# Altium PCB PCB1.PcbDoc
Units mil, origin at the board's own origin, x right, y up, seen from the top; angles counter-clockwise.
Board outline 6000 x 4000 mil, 2 copper layers (Top Layer, Bottom Layer), stack 61.756 mil thick; 26 components, 23 nets, 100 pads, 0 vias.
Unrouted connection lines stored in the file: 55.
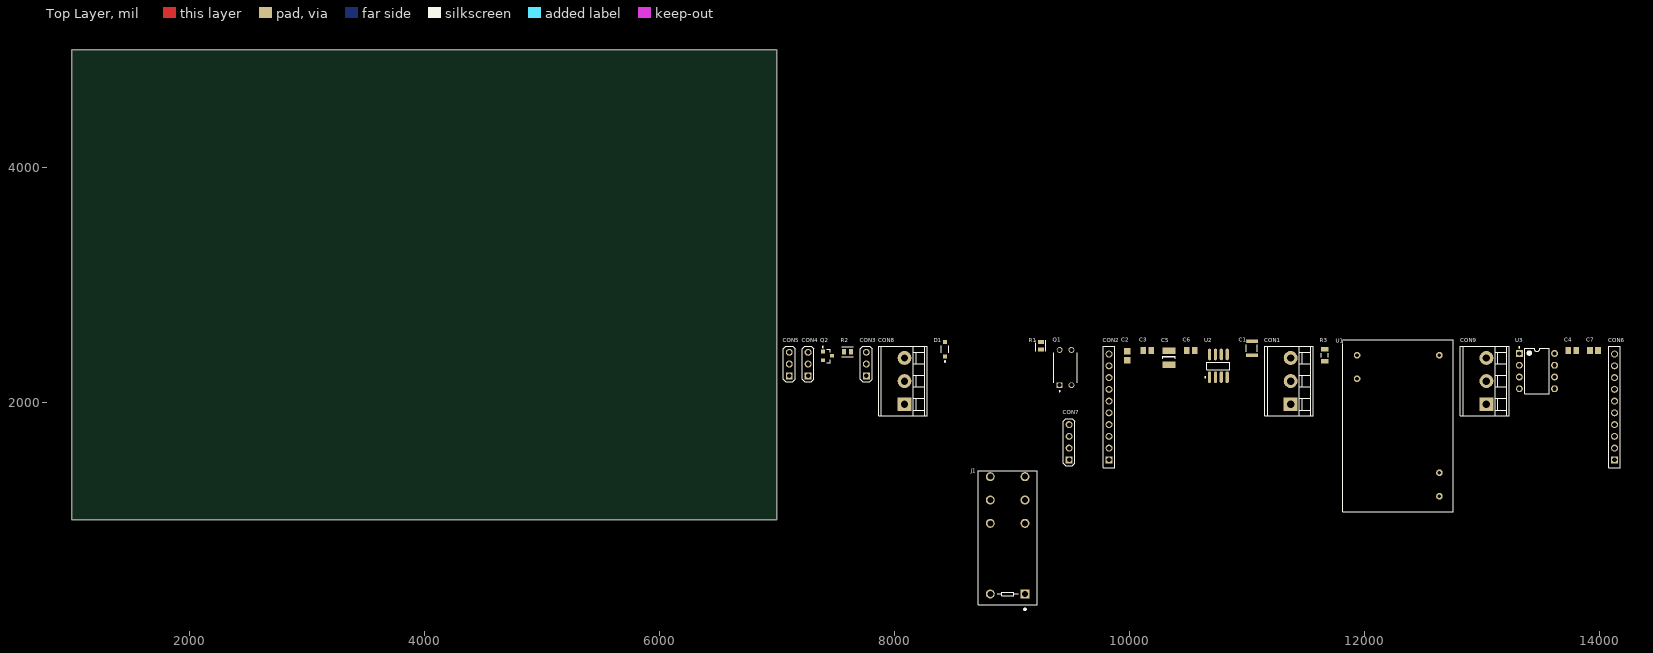
[diagram p0: Top Layer view]
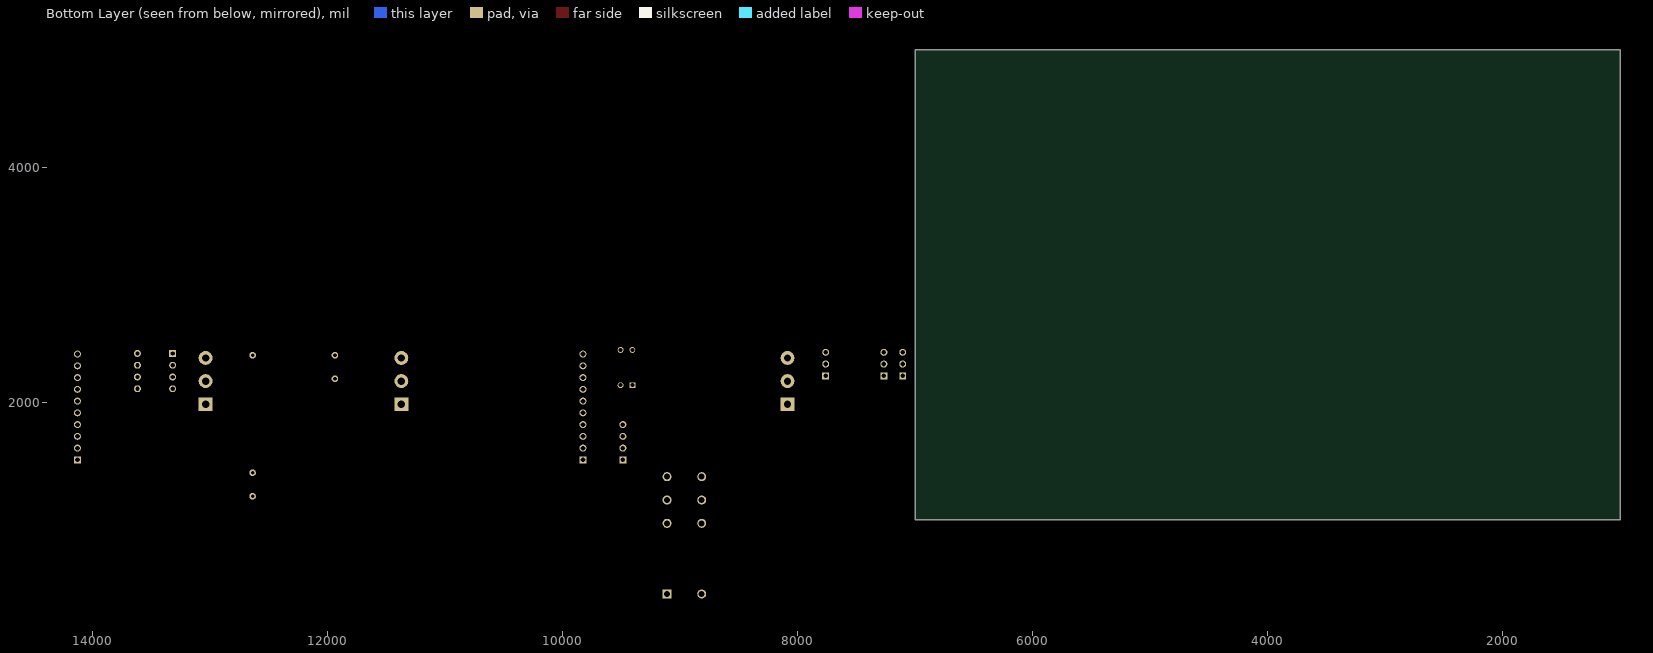
[diagram p1: Bottom Layer view, seen from below]

## Layer stack, top to bottom
Top Solder: solder mask 1, SM-001, Dk 4
Top Layer: signal copper 1.378
Dielectric 1: core 59, Core-043, Dk 4.3
Bottom Layer: signal copper 1.378
Bottom Solder: solder mask 1, SM-001, Dk 4

## Board outline
1000,1000 7000,1000 7000,5000 1000,5000

## Design rules (kind name [scope] priority, off if disabled: settings)
Clearance [All] p1: gap=10 ignorepadtopadclearanceinfootprint=FALSE except(0: Arc-Hole Track-Hole SMDPad-Hole THPad-Hole Via-Hole Fill-Hole Poly-Hole Region-Hole Text-Hole)
PolygonConnect [All] p1: connectstyle=Relief reliefconductorwidth=10 reliefentries=4 polygonreliefangle="90 Angle" airgapwidth=10
RoutingVias [All] p1: holewidth=28 width=50 viastyle="Through Hole" minholewidth=28 minwidth=50 maxholewidth=28 maxwidth=50
SolderMaskExpansion [All] p1: expansion=4 istentingtop=FALSE
Width [All] p1: maxlimit=10 minlimit=10 preferedwidth=10
30 further rules are at their usual default settings.

## Components (designator, comment, footprint, x,y, rotation, side; value= is the part's Value field where it differs from the comment)
C1 "47uF" MURA-1210_H_2.7_L 11040,2460 r90 top
C2 "10uF" CAPC2013X135X45ML10T25 9980,2395 r90 top
C3 "0.1uF" CAPC2013X140X45NL15T25 10150,2440 r0 top
C4 "0.1uF" CAPC2013X140X45NL15T25 13765,2440 r0 top
C5 "1uF" TANTAL_B 10335,2380 r90 top
C6 "0.1uF" CAPC2013X140X45NL15T25 10520,2440 r0 top
C7 "0.1uF" CAPC2013X140X45NL15T25 13950,2440 r0 top
CON1 "DG128-3" DG129-3 11370,2180 r90 top
CON2 "PBS-10" PBS-10 9825,1960 r90 top
CON3 "PLS-03" PLS-03 7760,2325 r90 top
CON4 "PLS-03" PLS-03 7265,2325 r90 top
CON5 "PLS-03" PLS-03 7105,2325 r90 top
CON6 "PBS-10" PBS-10 14125,1960 r90 top
CON7 "PLS-04" PLS-04 9485,1660 r90 top
CON8 "DG128-3" DG129-3 8085,2180 r90 top
CON9 "DG128-3" DG129-3 13035,2180 r90 top
D1 "1N4148W-13-F" FP-SOD123-MFG 8430,2450 r90 top value=2pF
J1 "9-1393239-1" RELAY_9-1393239-1 9110,369.21 r90 top
Q1 "PC817C" DIP762W50P254L650H458Q4B 9455,2295 r90 top
Q2 "MMBT2222ALT3G" ONSC-SOT-23-3-318-08_V 7430,2395 r0 top
R1 "150" FP-CR0805-IPC_C 9245,2480 r90 top
R2 "300" FP-CR0805-IPC_C 7600,2430 r0 top
R3 "10k" FP-CRCW1206-e3-IPC_C 11660,2400 r90 top
U1 "IRM-03-5" footprint_IRM-03-5 12635,1200 r90 top
U2 "REF198GSZ" ADI-R-8_M 10755,2310 r90 top
U3 "MCP3202-BI/P" PDIP300-P8 13465,2265 r0 top

## Footprints (in the part's own frame and the unit in brackets; to place one, negate y for a bottom-side part, rotate by r counter-clockwise, add the part's x,y. Pads: shape width x height; smd on the part's side, far side on the other; paste and mask are expansions set on the pad)
ADI-R-8_M [mm] "SOIC, 8-Leads, Body 4.9x3.9mm, Pitch 1.27mm, IPC Low Density"
  oval 2.5x0.7 smd: 1(-2.45,1.905) 2(-2.45,0.635) 3(-2.45,-0.635) 4(-2.45,-1.905) 5(2.45,-1.905) 6(2.45,-0.635) 7(2.45,0.635) 8(2.45,1.905)
  silkscreen extent -2.57,-2.5 0.8,2.93, body extent -2,-2.5 2,2.5, height 1.75
CAPC2013X135X45ML10T25 [mm] "Chip Capacitor, 2-Leads, Body 2.10x1.35mm, IPC Low Density"
  rect 1.4x1.5 smd: 1(-0.95,0) 2(0.95,0)
  body extent -1.05,-0.67 1.05,0.67, height 1.35
CAPC2013X140X45NL15T25 [mm] "Chip Capacitor, 2-Leads, Body 2.00x1.25mm, IPC Medium Density"
  rect 1.25x1.45 smd: 1(-0.85,0) 2(0.85,0)
  body extent -1.08,-0.7 1.07,0.7, height 1.4
DG129-3 [mm]
  rect 3x3 hole 1.6 paste-0.05 mask+0.05: 1(-5,0)
  round 3 hole 1.6 paste-0.05 mask+0.05: 2(0,0) 3(5,0)
  silkscreen extent -7.5,-4.9 7.5,5.6
DIP762W50P254L650H458Q4B [mm]
  rect 1.26x1.26 hole 0.85: 1(-3.81,1.27)
  round 1.26 hole 0.85: 2(-3.81,-1.27) 3(3.81,-1.27) 4(3.81,1.27)
  silkscreen extent -5.18,-2.54 3.25,2.54, body extent -3.94,-2.29 3.94,2.29, height 4.8
footprint_IRM-03-5 [mil]
  round 56 hole 31.5: +V(1000,700) -V(1200,700) AC/L(0,0) AC/N(200,0) NC(1200,0)
  silkscreen extent -130,-120 1330,820, body extent -130,-125 1327,820, height 591
FP-CR0805-IPC_C [mil]
  rect 33.79x49.69 smd paste+0 mask+0: 1(-30.59,0) 2(30.59,0)
  silkscreen extent -47,-42 47,42, body extent -51,-31 51,31, height 10
FP-CRCW1206-e3-IPC_C [mil]
  rect 37.64x65.28 smd paste+0 mask+0: 1(-52.21,0) 2(52.21,0)
  silkscreen extent -19,-31 19,31, body extent -75,-38 75,38, height 10
FP-SOD123-MFG [mm]
  rect 0.9x0.95 smd paste+0 mask+0: 1(-1.575,0) 2(1.575,0)
  silkscreen extent -2.75,-0.85 0.75,0.85, body extent -2.12,-0.95 2.12,0.95, height 0.25
MURA-1210_H_2.7_L [mm] "Chip Capacitor, 2-Leads, Body 3.5x2.7mm, IPC High Density"
  rect 0.75x2.6 smd: 1(-1.525,0) 2(1.525,0)
  silkscreen extent -0.75,-1.2 0.75,1.2, body extent -1.75,-1.35 1.75,1.35, height 2.7
ONSC-SOT-23-3-318-08_V [mm] "SOT23, 3-Leads, Body 2.92x1.3mm, Pitch 0.95mm"
  rect 0.9x0.8 smd: 1(-1,0.95) 2(-1,-0.95) 3(1,0)
  silkscreen extent -1.12,-1.46 0.65,2.02, body extent -0.65,-1.46 0.65,1.46, height 1.11
PBS-10 [mm]
  rect 1.5x1.5 hole 1 paste-0.05 mask+0.05: 1(-11.43,0)
  round 1.5 hole 1 paste-0.05 mask+0.05: 2(-8.89,0) 3(-6.35,0) 4(-3.81,0) 5(-1.27,0) 6(1.27,0) 7(3.81,0) 8(6.35,0) 9(8.89,0) 10(11.43,0)
  silkscreen extent -13.1,-1.27 13.1,1.27, body extent -13.1,-1.27 13.1,1.27, height 8.5
PDIP300-P8 [mm] "8-Pin Plastic Dual In-Line Package (PDIP)"
  rect 1.5x1.5 hole 0.9: 1(-3.81,3.81)
  round 1.5 hole 0.9: 2(-3.81,1.27) 3(-3.81,-1.27) 4(-3.81,-3.81) 5(3.81,-3.81) 6(3.81,-1.27) 7(3.81,1.27) 8(3.81,3.81)
  silkscreen extent -3.93,-4.9 2.65,5.23, body extent -3.55,-4.9 3.55,4.9, height 4.32
PLS-03 [mm]
  rect 1.5x1.5 hole 1 paste-0.05 mask+0.05: 1(-2.54,0)
  round 1.5 hole 1 paste-0.05 mask+0.05: 2(0,0) 3(2.54,0)
  silkscreen extent -3.81,-1.27 3.81,1.27, body extent -3.81,-1.27 3.81,1.27, height 8.6
PLS-04 [mm]
  rect 1.5x1.5 hole 1 paste-0.05 mask+0.05: 1(-3.81,0)
  round 1.5 hole 1 paste-0.05 mask+0.05: 2(-1.27,0) 3(1.27,0) 4(3.81,0)
  silkscreen extent -5.08,-1.27 5.08,1.27, body extent -5.08,-1.27 5.08,1.27, height 8.6
RELAY_9-1393239-1 [mm]
  round 1.95 hole 1.3: 11(20.3,0) 11-1(20.3,7.5) 12(15.26,0) 12-1(15.26,7.5) 14(25.34,0) 14-1(25.34,7.5) A2(0,7.5)
  rect 1.95x1.95 hole 1.3: A1(0,0)
  silkscreen extent -3.51,-2.6 26.65,10.1, body extent -2.34,-2.62 26.66,10.08, height 15.7
TANTAL_B [mm]
  rect 1.4x2.8 smd paste-0.05 mask+0.05: 1(1.5,0) 2(-1.5,0)
  silkscreen extent -0.3,-1.35 0.3,1.35, body extent -1.75,-1.4 1.75,1.4, height 1.9

## Part data
C1: library part CMP-2000-06362-1, "Cap Ceramic, 47 uF, +/- 10%, -55 to 85 degC, 2-Pin SMD (1210), RoHS, Tape and Reel", Capacitance=47µF, Manufacturer=Murata, Operating Temperature=-55°C~85°C, Package / Case=1210(3225Metric), Package Description="2-Pin Surface Mount Device, Body 3.2 x 2.5 mm", Package Reference=1210, Ratings=-, Standard Package=1, Temperature Coefficient=X5R, Tolerance=±10%, Voltage - Rated=16V, Applications=GeneralPurpose, Catalog Drawings=GRMSeries_1210_2.5, Category=Capacitors, Datasheet URL=http://psearch.en.murata.com/capacitor/product/GRM32ER61C476KE15%23.pdf, Datasheet Version=04/2016, Family=CeramicCapacitors, Features=-, Height - Seated (Max)=-, Lead Spacing=-, Lead Style=-, Manufacturer URL=http://www.murata.com/, Mounting Technology=SurfaceMount, Mounting Type=SurfaceMount,MLCC, Online Catalog=GRMSeries, Other Names=490-6539-6, Packaging=Digi-Reel®, Product Training Modules=High-CapMultilayerCeramicCapacitors, Series=GRM, Size / Dimension="0.126\"Lx0.098\"W(3.20mmx2.50mm)", Thickness (Max)="0.106\"(2.70mm)", Voltage Rating DC=16V
C2: library part CMP-2000-04946-1, "GRM21BR61E106KA73L / 10uF, +/- 10%, 25 V, 0805", Capacitance=1µF, Case Size/Dimension=0805, Dielectric=X7R, Manufacturer=Murata, Package Description="2-Pin Surface Mount Device, Body 2 x 1.25 mm", Package Reference=805, Rated Voltage=16V, Tolerance (%)=±10%, Datasheet URL=https://datasheet.ciiva.com/34302/1858922-34302874.pdf, Datasheet Version=Mar-08, Manufacturer URL=http://www.murata.com/
C3 C4 C6 C7: library part CMP-2007-03401-1, "GRM21BR71H104K / 0.1 мкФ X7R 10% 50В 0805", Manufacturer=Murata, Part Number=GRM21BR71C475KA73L
C5: library part _TANTAL-B, "TANTAL TECAP1/50V B, 10%", Lifetime @ Temp=2000Hrs@105℃, Assembly type="Manual Part", Note="Tantalum Capacitors", Publisher="Catcatcat Electronics", website developer=http://catcatcat.d-lan.dp.ua/
CON1 CON8 CON9: library part DG129-3, Temp.Characteristic="-40C to +85C", Assembly type="Manual Part", Note=Connector, Publisher="Catcatcat Electronics", website developer=http://catcatcat.d-lan.dp.ua/
CON2 CON6: "2.54mm", Temp.Characteristic="-40C to +85C", Assembly type="Manual Part", Note=Connector, Publisher="Catcatcat Electronics", website developer=http://catcatcat.d-lan.dp.ua/
CON3 CON4 CON5 CON7: "2.54 mm", Temp.Characteristic="-40C to +85C", Assembly type="Manual Part", Note=Connector, Publisher="Catcatcat Electronics", website developer=http://catcatcat.d-lan.dp.ua/
D1: library part CMP-12791-000005-1, "DIODE GEN PURP 100V 150MA SOD123", Capacitance=2pF, Forward Current=300mA, Manufacturer="Diodes Inc.", Max Junction Temp=+150°C, Max Repetitive Reverse Voltage=100V, Max Surge Forward Current=1A, Package=SOD123, Peak Reverse Current=1uA, Temperature="-65°C to +150°C", Temperature Range Low=-65°C, Automotive=No, Category=Diode, ComponentLink2Description=Datasheet, ComponentLink2URL=https://upverter.com/datasheet/628e7d6fee5901eee6eef4567d1c3569f2cd3cde.pdf, Device Class L1="Discrete Semiconductors", Device Class L2=Diodes, Device Class L3="Rectifier Diodes", Digikey Description="DIODE GEN PURP 100V 150MA SOD123", Footprint Url=https://www.diodes.com/assets/Package-Files/SOD123.pdf, Height=1.45mm, Lead Free=Yes, Manufacturer Part Number=1N4148W-13-F, Mouser Description="1N4148W Series 2 A 100 V 400 mW Surface Mount Fast Switching Diode - SOD-123", Octopart=https://octopart.com/1n4148w-13-f-diodes+inc.-2359612, Reverse Voltage=100V, RoHS=TRUE, Standoff Height=0mm, Temperature Range High=+150°C
J1: "RELAY GEN PURPOSE SPDT 16A 5V", Package=None, Availability=Unavailable, MF="{'manufacturer': u'TE Connectivity'}", MP=9-1393239-1, Price=None
Q1: "High Density Mounting Type Photocoupler", Package=None, Availability=Unavailable, MF="{'manufacturer': u'Taiwan Semiconductor'}", MP=PC817C, Price=None
Q2: library part CMP-1048-00592-1, "General Purpose Transistor, NPN Silicon, 3-Pin SOT-23, Pb-Free, Tape and Reel", Manufacturer="On Semiconductor", ComponentLink1Description="Manufacturer URL", ComponentLink1URL=http://www.onsemi.com/, ComponentLink2Description=Datasheet, ComponentLink2URL=http://www.onsemi.cn/pub_link/Collateral/MMBT2222LT1-D.PDF, ComponentLink3Description="Package Specification", ComponentLink3URL=http://www.onsemi.cn/pub_link/Collateral/318-08.PDF, DatasheetVersion="Rev. 10", fT Min (MHz)=300, IC Continuous (A)=0.6, Mounting Technology="Surface Mount", PackageDescription="3-Pin Small Outline Transistor, Body 2.92 x 1.3 mm, Pitch 0.95 mm", PackageReference=SOT-23-3-318-08, PackageVersion="Rev. AP, 11/2009", Packing="Tape and Reel", PartNumber=MMBT2222ALT3G, Polarity=NPN, RoHS=TRUE
R1: library part CMP-07231-005922-1, "0805 150Ω 0.125W 1%", Case Code (Imperial)=0805, Case Code (Metric)=2012, Max Operating Temperature=155°C, Max Power Dissipation=125mW, Min Operating Temperature=-55°C, Package Quantity=1, Resistance=300kR, Temperature Coefficient=100ppm/°C, Tolerance=1%, Voltage Rating=150V, Case/Package=0805, Composition="Thick Film", Contact Plating=Tin, Depth=1.25mm, Features="Moisture Resistant", Height=0.024inch, Length=2mm, Military Standard=Not, Mount="Surface Mount", Number of Terminations=2, Packaging="Tape and Reel", Power Rating=125mW, Radiation Hardening=No, Termination=SMD/SMT, Thickness=508um, Width=0.049inch
R2: library part CMP-07231-005922-1, "0805 300kΩ 0.125W 1%", Case Code (Imperial)=0805, Case Code (Metric)=2012, Max Operating Temperature=155°C, Max Power Dissipation=125mW, Min Operating Temperature=-55°C, Package Quantity=1, Resistance=300kR, Temperature Coefficient=100ppm/°C, Tolerance=1%, Voltage Rating=150V, Case/Package=0805, Composition="Thick Film", Contact Plating=Tin, Depth=1.25mm, Features="Moisture Resistant", Height=0.024inch, Length=2mm, Military Standard=Not, Mount="Surface Mount", Number of Terminations=2, Packaging="Tape and Reel", Power Rating=125mW, Radiation Hardening=No, Termination=SMD/SMT, Thickness=508um, Width=0.049inch
R3: library part CMP-2003-04807-2, "10kΩ, 1%, 0.25W 1206", Case Code (Imperial)=1206, Case Code (Metric)=3216, Max Operating Temperature=155°C, Max Power Dissipation=250mW, Min Operating Temperature=-55°C, Package Quantity=10, Resistance=10kR, Temperature Coefficient=100ppm/°C, Tolerance=1%, Voltage Rating=200V, Case/Package=1206, Composition="Thick Film", Contact Plating=Tin, Depth=1.6mm, Features="Automotive AEC-Q200", Height=0.55mm, Lead Free="Lead Free", Length=3.2mm, Military Standard=Not, Number of Pins=2, Number of Terminations=2, Packaging="Tape and Reel", Power Rating=250mW, Radiation Hardening=No, Termination=SMD/SMT, Voltage Rating (DC)=200V, Weight=0.000353oz, Width=0.063inch, Working Voltage=200V
U1: "AC-DC Single output Encapsulated power supply; Output 5Vdc at 0.6A; PCB mount, miniature size", Package=None, Availability=Unavailable, MF="{'manufacturer': u'MEAN WELL'}", MP=IRM-03-5, Price=None
U2: library part CMP-0784-00265-1, "Precision Micropower, Low Dropout Voltage Reference, 4.096 V Output, 3.4 to 15 V Supply, Industrial, 8-pin SOIC (R-8), Tube", Manufacturer="Analog Devices", Operating Temp Range="-40 to 85 degC", Code_JEDEC=MS-012-AA, ComponentLink1Description="Manufacturer URL", ComponentLink1URL=http://www.analog.com/en/index.html, ComponentLink2Description=Datasheet, ComponentLink2URL=http://www.analog.com/static/imported-files/data_sheets/REF19xSeries.pdf, ComponentLink3Description="Package Specification", ComponentLink3URL=http://www.analog.com/static/imported-files/packages/PKG_PDF/SOIC_Narrow%20(R)/R_8.pdf, ComponentLink4Description="URL Link1", ComponentLink4URL="Product URL:http://www.analog.com/en/special-linear-functions/voltage-references/ref198/products/product.html", DatasheetVersion="Rev. L", Mounting Technology="Surface Mount", PackageDescription="8-Pin Standard Small Outline Package, Body 4.9 x 3.9 mm, Pitch 1.27 mm", PackageReference=R-8, PackageVersion="060506-A, 06/2006", Packing=Tube, PartNumber=REF198GSZ, Ref Out TC (ppm/C)=10, Vout=4.096V
U3: library part CMP-0188-00011-2, "2.7V Dual Channel 12-Bit A/D Converter with SPI Serial Interface, 8-Pin PDIP, B Performance Grade, Industrial Temperature", Code_JEDEC=MS-001, ComponentLink1Description="Manufacturer URL", ComponentLink1URL=http://www.microchip.com/, ComponentLink2Description=Datasheet, ComponentLink2URL=http://ww1.microchip.com/downloads/en/DeviceDoc/21034F.pdf, ComponentLink3Description="Package Specification", ComponentLink3URL=http://www.microchip.com/stellent/groups/techpub_sg/documents/packagingspec/en012702.pdf, DatasheetVersion="revF, Nov-2011", PackageDescription="8-Lead Plastic Dual In-Line (P) - 300 mil Body [PDIP]", PackageReference=PDIP300-P8, PackageVersion="revBB, Aug-2009", RevisionNote="URLs added. DatasheetVersion updated."

## Nets (pads, with @x,y where several pads share a name; then routed paths per layer and width w, separated by ;. In a path a pad name is that pad's centre, name@x,y a point inside that pad or via, vN(x,y) a via of type N, cw(c..) or ccw(c..) an arc to the next point about the centre after c; other vN are vias at no path point)
220V(L): CON1.1 J1.11 J1.11-1 U1.AC/L
220V(N): CON1.2 CON8.2 U1.AC/N
+3.3V: CON2.7 R1.1
+4.096V: C5.1 C6.2 R3.2 U2.6 U3.8
+5V: C1.2 C2.2 C3.2 CON3.1 CON4.1 CON5.1 CON7.3 D1.1 J1.A1 Q1.4 U2.2 U2.3
GND_AC: CON1.3 CON8.3
GND_DC: C1.1 C2.1 C3.1 C4.2 C5.2 C6.1 C7.2 CON2.1 CON3.3 CON4.3 CON5.3 CON7.4 CON9.3 Q1.2 Q2.2 U2.4 U3.4
I2C_SCL: CON7.1
I2C_SDA: CON7.2
NetC4_1: C4.1 CON9.2 U3.3
NetC7_1: C7.1 CON9.1 R3.1 U3.2
NetCON2_9: CON2.9 CON5.2
NetCON2_11: CON4.2
NetCON2_13: CON3.2
NetCON6_4: CON6.4 U3.5
NetCON6_6: CON6.6 U3.6
NetCON6_8: CON6.8 U3.7
NetCON6_10: CON6.10 U3.1
NetCON8_1: CON8.1 J1.14 J1.14-1
NetD1_2: D1.2 J1.A2 Q2.3
NetQ1_1: Q1.1 R1.2
NetQ1_3: Q1.3 R2.1
NetQ2_1: Q2.1 R2.2
pads on no net: CON2.2 CON2.3 CON2.4 CON2.5 CON2.6 CON2.8 CON2.10 CON6.1 CON6.2 CON6.3 CON6.5 CON6.7 CON6.9 J1.12 J1.12-1 U1.+V U1.-V U1.NC U2.1 U2.5 U2.7 U2.8